# EAGLE board schema (EAGLE 9.6.2)
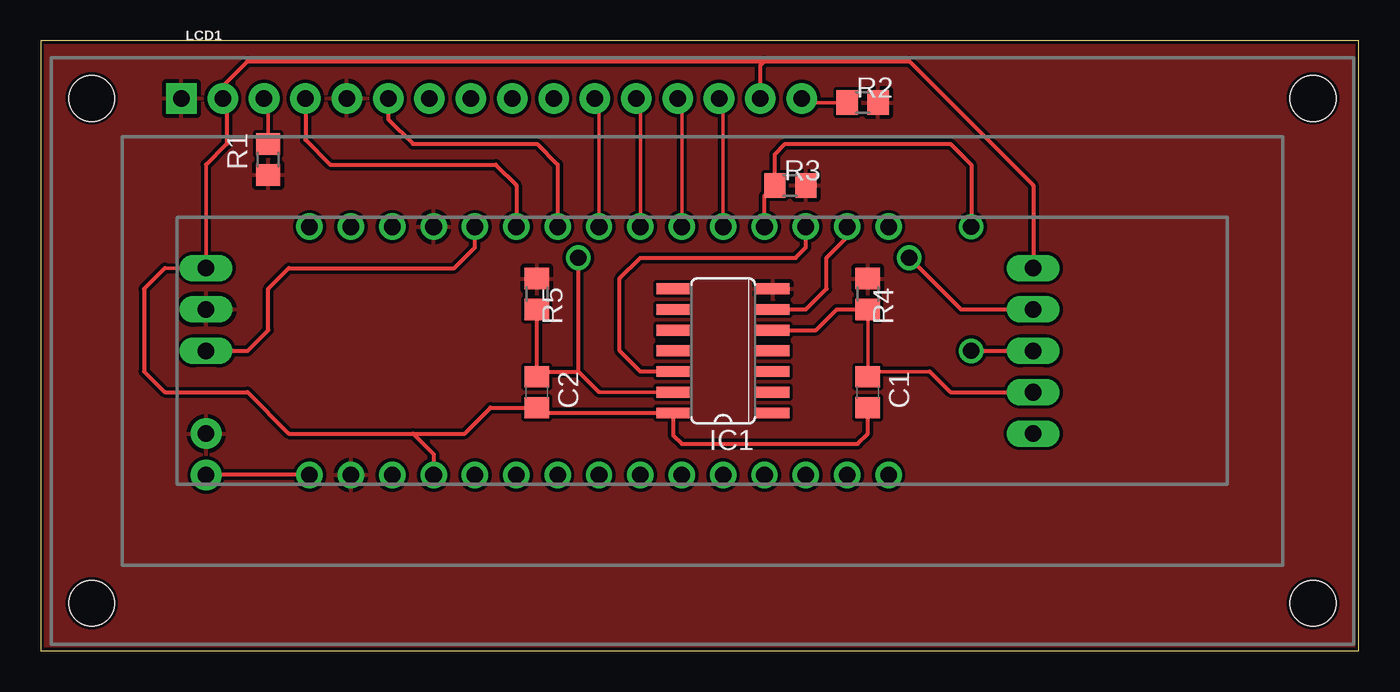
[diagram p0: board, top side]
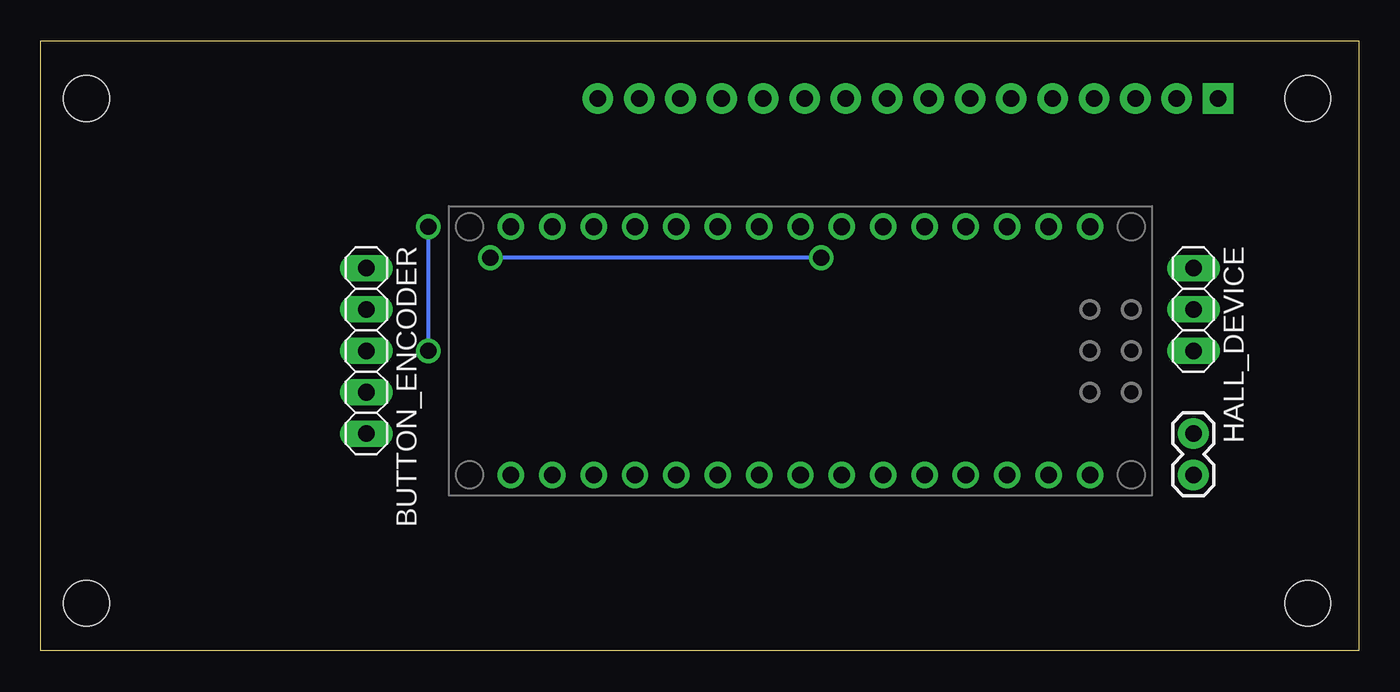
[diagram p1: board, bottom side, seen from below]

Size 80.95 x 37.45 mm. Coordinates in mm from the lower left corner, seen from the top.
Outline: 0,0 80.95,0 80.95,37.45 0,37.45 0,0
Copper layers (1*16): Top 0.035mm / dielectric 1.5mm / Bottom 0.035mm
Design rules "SparkFun": minimum track width 8mil, minimum drill 20mil, track to track 8mil, track to pad 8mil, pad to pad 8mil, via to via 8mil, smd to smd 8mil, copper to edge 8mil, drill to drill 8mil, minimum pad ring 12mil, minimum via ring 10mil, stop-mask expansion 4mil, vias tented up to drill 20mil, thermal gap 10mil

## Footprints (pad centres in the part's own frame; a part is rotated, then mirrored left to right if it is on the bottom)
1X05 = drill 1.016 long: 1 -5.08,0; 2 -2.54,0; 3 0,0; 4 2.54,0; 5 5.08,0
C0805 = smd 1.3 x 1.5: 1 -0.95,0; 2 0.95,0
1X03 = drill 1.016 long: 1 -2.54,0; 2 0,0; 3 2.54,0
SO14 = smd 0.66 x 2.032: 1 -3.81,-3.073; 2 -2.54,-3.073; 3 -1.27,-3.073; 4 0,-3.073; 5 1.27,-3.073; 6 2.54,-3.073; 7 3.81,-3.073; 8 3.81,3.073; 9 2.54,3.073; 10 1.27,3.073; 11 0,3.073; 12 -1.27,3.073; 13 -2.54,3.073; 14 -3.81,3.073
NANO = drill 1.016: 1 -7.62,17.78; 2 -7.62,15.24; 3 -7.62,12.7; 4 -7.62,10.16; 5 -7.62,7.62; 6 -7.62,5.08; 7 -7.62,2.54; 8 -7.62,0; 9 -7.62,-2.54; 10 -7.62,-5.08; 11 -7.62,-7.62; 12 -7.62,-10.16; 13 -7.62,-12.7; 14 -7.62,-15.24; 15 -7.62,-17.78; 16 7.62,-17.78; 17 7.62,-15.24; 18 7.62,-12.7; 19 7.62,-10.16; 20 7.62,-7.62; 21 7.62,-5.08; 22 7.62,-2.54; 23 7.62,0; 24 7.62,2.54; 25 7.62,5.08; 26 7.62,7.62; 27 7.62,10.16; 28 7.62,12.7; 29 7.62,15.24; 30 7.62,17.78
1X02 = drill 1.016 pad 1.88: 1 0,0; 2 2.54,0
LCD-16X2_NOSILK = drill 1.016 pad 1.88 square: 1 -32,15.5 | drill 1.016 pad 1.88: 2 -29.46,15.5; 3 -26.92,15.5; 4 -24.38,15.5; 5 -21.84,15.5; 6 -19.3,15.5; 7 -16.76,15.5; 8 -14.22,15.5; 9 -11.68,15.5; 10 -9.14,15.5; 11 -6.6,15.5; 12 -4.06,15.5; 13 -1.52,15.5; 14 1.02,15.5; 15 3.56,15.5; 16 6.1,15.5 | hole 2.8: -37.5,15.5; -37.5,-15.5; 37.5,15.5; 37.5,-15.5
R0805 = smd 1.3 x 1.5: 1 -0.95,0; 2 0.95,0

## Placement (x,y rotation side)
BUTTON_ENCODER  [1X05]  60.96,18.41 270 bottom
C1  104  [C0805]  50.8,15.88 270 top
C2  104  [C0805]  30.48,15.88 270 top
HALL_DEVICE  [1X03]  10.16,20.95 270 bottom
IC1  74HC14D  [SO14]  41.91,18.41 90 top
J1  NANO_FOOTPRINT  [NANO]  34.29,18.41 270 bottom
J2  [1X02]  10.16,10.79 90 bottom
LCD1  LCD-16X2NOSILK  [LCD-16X2_NOSILK]  40.64,18.41 0 top
R1  2.7k  [R0805]  13.97,30.16 90 top
R2  220ohm  [R0805]  50.48,33.65 0 top
R3  10k  [R0805]  46.04,28.57 0 top
R4  2k  [R0805]  50.8,21.9 270 top
R5  2k  [R0805]  30.48,21.9 270 top

## Library data of the parts
BUTTON_ENCODER HALL_DEVICE = pinhead
C1 C2 = rcl; SPICEPREFIX: C
IC1 = 74xx-eu
J1 = SparkFun-Boards
J2 = SparkFun-Connectors
LCD1 = SparkFun-Displays; SF_ID: LCD-00255
R1-R5 = rcl; SPICEPREFIX: R

## Nets
+12V: J1.30 J2.1
GND: HALL_DEVICE.2 IC1.7 J1.4 J1.29 J2.2 LCD1.1 LCD1.5 R1.1 R2.2 R3.2 R4.1 R5.1
N$1: LCD1.3 R1.2
N$2: LCD1.16 R2.1
N$3: J1.11 LCD1.14
N$4: J1.10 LCD1.13
N$5: J1.9 LCD1.12
N$6: J1.8 LCD1.11
N$7: J1.7 LCD1.6
N$8: J1.6 LCD1.4
N$9: HALL_DEVICE.3 J1.5
N$10: BUTTON_ENCODER.3 J1.12 R3.1
N$12: IC1.12 J1.13
N$13: IC1.6 J1.14
N$14: BUTTON_ENCODER.2 C2.1 IC1.13 R5.2
N$15: BUTTON_ENCODER.4 C1.1 IC1.5 R4.2
VCC: BUTTON_ENCODER.1 C1.2 C2.2 HALL_DEVICE.1 IC1.14 J1.27 LCD1.2 LCD1.15

## Tracks (layer width: path | path; a pad name or v marks a point on that pad's centre or on a via)
+12V
  Top 0.254: J1.30 J2.1
GND
  pour Top: 0,37.46 0,0 81.28,0 81.28,37.46
N$1
  Top 0.203: LCD1.3 13.97,33.66 R1.2
N$2
  Top 0.254: LCD1.16 46.99,33.66 R2.1
N$3
  Top 0.203: LCD1.14 41.91,33.66 J1.11
N$4
  Top 0.203: LCD1.13 39.37,33.66 J1.10
N$5
  Top 0.203: LCD1.12 36.83,33.66 J1.9
N$6
  Top 0.203: LCD1.11 34.29,33.66 J1.8
N$7
  Top 0.254: J1.7 31.75,29.84 30.48,31.12 22.86,31.12 21.34,32.63 LCD1.6
N$8
  Top 0.254: LCD1.4 16.26,31.37 17.78,29.84 27.94,29.84 29.21,28.57 J1.6
N$9
  Top 0.254: HALL_DEVICE.3 12.7,18.41 13.97,19.68 13.97,22.22 15.24,23.49 25.4,23.49 26.67,24.76 J1.5
N$10  (via drill 1)
  Top 0.254: J1.12 44.45,27.93 R3.1 45.09,30.48 45.72,31.12 55.88,31.12 57.15,29.84 v57.15,26.04 | v57.15,18.41 BUTTON_ENCODER.3
  Bottom 0.254: v57.15,26.04 v57.15,18.41
N$12
  Top 0.254: IC1.12 36.83,17.14 35.56,18.41 35.56,22.86 36.83,24.13 46.36,24.13 46.99,24.76 J1.13
N$13
  Top 0.254: IC1.6 46.99,20.95 48.26,22.22 48.26,24.13 49.53,25.4 J1.14
N$14  (via drill 1)
  Top 0.203: 34.29,15.88 IC1.13
  Top 0.254: R5.2 C2.1 30.8,17.14 33.02,17.14 | 33.02,17.14 34.29,15.88 | 33.02,17.14 v33.02,24.13 | v53.34,24.13 56.52,20.95 BUTTON_ENCODER.2
  Bottom 0.254: v33.02,24.13 v53.34,24.13
N$15
  Top 0.203: R4.2 50.8,17.14 | 50.8,17.14 C1.1 | 54.61,17.14 50.8,17.14
  Top 0.254: 54.61,17.14 55.88,15.88 BUTTON_ENCODER.4 | IC1.5 47.62,19.68 48.9,20.95 R4.2
VCC
  Top 0.203: LCD1.2 11.43,33.66 11.43,33.65 | 7.62,23.49 HALL_DEVICE.1 10.16,29.84
  Top 0.254: LCD1.2 11.18,34.68 12.7,36.2 44.45,36.2 | LCD1.15 44.2,35.95 44.45,36.2 | 10.16,29.84 11.43,31.12 11.43,33.65 | 7.62,23.49 6.35,22.22 6.35,17.14 7.62,15.88 12.7,15.88 15.24,13.34 22.86,13.34 | 22.86,13.34 24.13,12.06 J1.27 | 44.45,36.2 53.34,36.2 60.96,28.57 BUTTON_ENCODER.1 | 22.86,13.34 26.04,13.34 27.62,14.92 C2.2 30.8,14.6 IC1.14 38.84,13.23 39.37,12.7 50.17,12.7 50.8,13.34 C1.2